# Altium PCB XPIMU_1V1.PCBDOC (part 3 of 3)
Units mil, origin at the board's own origin, x right, y up, seen from the top; angles counter-clockwise.
Board outline 1578.8 x 1145.73 mil, 6 copper layers (Top Layer, Internal Plane 1, Mid-Layer 1, Mid-Layer 2, Mid-Layer 3, Bottom Layer); 139 components, 101 nets, 532 pads, 256 vias.
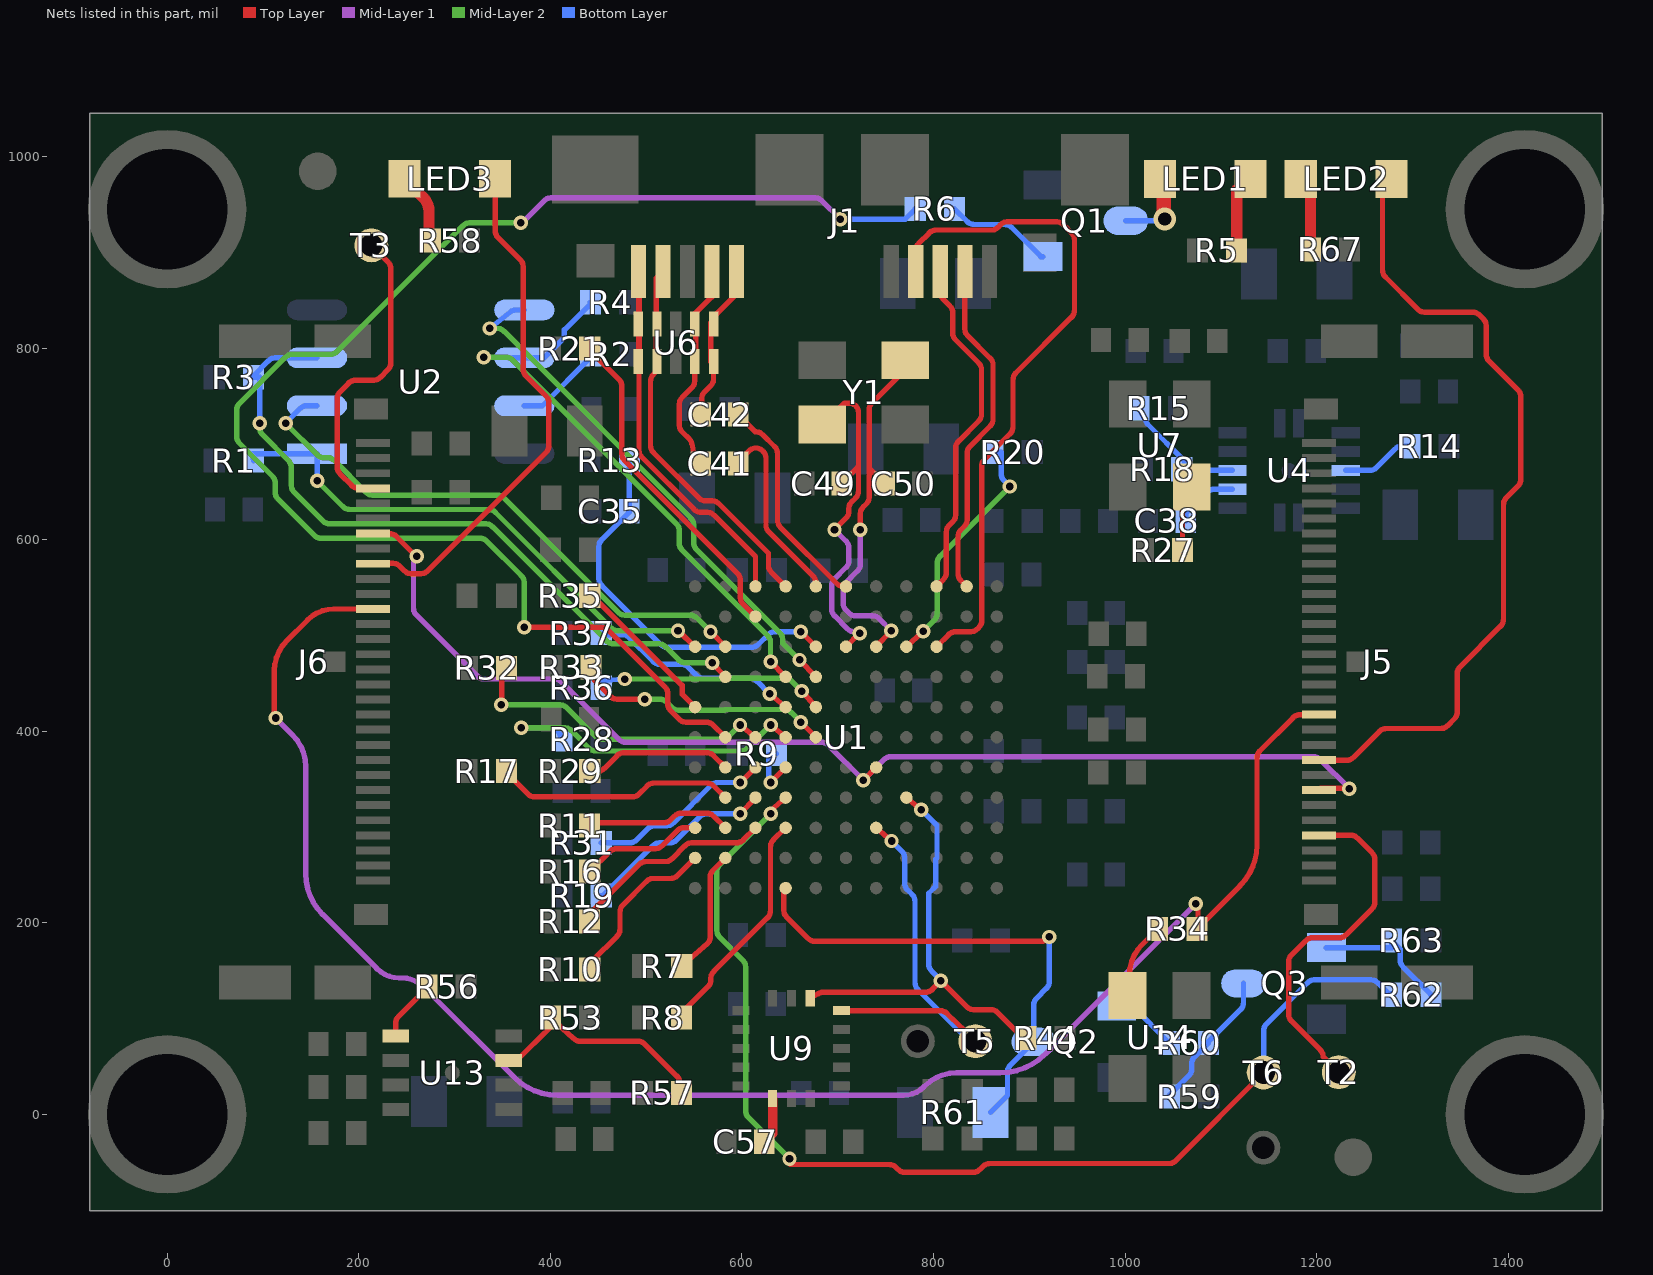
[diagram p7: the nets of this part, all layers, seen from the top]

## Via types
v1: diameter 15, hole 7.87, Top Layer to Bottom Layer, 205 vias
v2: diameter 23.62, hole 13.78, Top Layer to Bottom Layer, 41 vias
v3: diameter 0, hole 0, Top Layer to Bottom Layer, 6 vias
v4: diameter 19, hole 9.84, Top Layer to Bottom Layer, 4 vias

## Nets (pads, with @x,y where several pads share a name; then routed paths per layer and width w, separated by ;. In a path a pad name is that pad's centre, name@x,y a point inside that pad or via, vN(x,y) a via of type N, cw(c..) or ccw(c..) an arc to the next point about the centre after c; other vN are vias at no path point) (continued)
GPIO45: R6.1 U1.F2 | length 1530.9
  Top Layer w5.6: v1(372.66,508.44) 453.42,508.44 cw(c453.42,498.64) 460.35,505.57 519.79,446.13 cw(c512.86,439.2) 522.66,439.2 522.66,428.5 ccw(c532.46,428.5) 525.53,421.57 534.79,412.31 ccw(c541.72,419.24) 541.72,409.44 562.88,409.44 cw(c562.88,399.64) 569.81,406.57 U1.F2@582.68,393.7
  Mid-Layer 1 w5.6: v1(369.21,930.64) 370.54,930.64 393.82,953.92 cw(c400.75,946.99) 400.75,956.79 676.26,956.79 cw(c676.26,946.99) 683.18,953.92 v1(702.66,934.44)
  Mid-Layer 2 w5.6: v1(369.21,930.64) 315.92,930.64 ccw(c315.92,920.84) 308.99,927.77 177.53,796.31 cw(c170.6,803.24) 170.6,793.44 130.72,793.44 ccw(c130.72,783.64) 123.79,790.57 75.53,742.31 ccw(c82.46,735.38) 72.66,735.38 72.66,707.5 ccw(c82.46,707.5) 75.53,700.57 109.97,666.13 cw(c103.04,659.2) 112.84,659.2 112.84,649.32 ccw(c122.64,649.32) 115.71,642.39 153.79,604.31 ccw(c160.72,611.24) 160.72,601.44 326.6,601.44 cw(c326.6,591.64) 333.53,598.57 369.79,562.31 cw(c362.86,555.38) 372.66,555.38 v1(372.66,508.44)
  Bottom Layer w5.6: v1(702.66,934.44) 770.51,934.44 770.51,934.77 R6.1@781.01,945.27
IMU_INT: R44.1 U1.H8 U9.6 | length 476.3
  Top Layer w5.6: U9.6@671.35,121.26 679.7,126.11 cw(c684.62,117.64) 684.62,127.44 791.6,127.44 ccw(c791.6,137.24) 798.53,130.31 v1(807.66,139.44) 834.79,112.31 ccw(c841.72,119.24) 841.72,109.44 859.7,109.44 cw(c859.7,99.64) 866.63,106.57 892.19,81.02 R44.1@896.44,79.71 ; U1.H8@771.65,330.71 v1(787.4,317.89)
  Bottom Layer w5.6: v1(787.4,317.89) 803.66,301.64 803.66,267.82 802.45,266.61 802.45,238.31 795.03,230.89 795.03,156.8 ; v1(807.66,139.44) 807.66,140.12 797.9,149.87 ; 795.03,156.8 ccw(c804.83,156.8) 797.9,149.87 ; 795.03,156.8 ccw(c804.83,156.8) 797.9,149.87
LEDOUT0: J5.9 LED2.1 | length 842.2
  Top Layer w5.6: J5.9@1202.39,370.08 1202.8,369.67 1231.31,369.67 ccw(c1231.31,379.47) 1238.24,372.55 1265.62,399.93 cw(c1272.55,393) 1272.55,402.8 1329.54,402.8 ccw(c1329.54,412.6) 1336.47,405.67 1343.83,413.03 ccw(c1336.91,419.96) 1346.71,419.96 1346.71,460.31 cw(c1356.51,460.31) 1349.58,467.24 1392.08,509.74 ccw(c1385.15,516.67) 1394.95,516.67 1394.95,636.6 cw(c1404.75,636.6) 1397.82,643.53 1410.15,655.86 ccw(c1403.22,662.79) 1413.02,662.79 1413.02,749.29 ccw(c1403.22,749.29) 1410.15,756.22 1379.71,786.66 cw(c1386.64,793.59) 1376.84,793.59 1376.84,823.41 ccw(c1367.04,823.41) 1373.97,830.34 1369.75,834.55 ccw(c1362.82,827.62) 1362.82,837.42 1312.59,837.42 cw(c1312.59,847.22) 1305.66,840.29 1271.53,874.43 cw(c1278.46,881.36) 1268.66,881.36 1268.66,958.41 cw(c1278.46,958.41) 1271.53,965.34 LED2.1@1277.86,976.47
LEDOUT1: J6.9 LED3.1 | length 544.3
  Top Layer w5.6: J6.9@214.93,574.8 215.38,575.25 235.81,575.25 cw(c235.81,565.45) 242.74,572.38 247.76,567.36 ccw(c254.69,574.29) 254.69,564.49 264.98,564.49 ccw(c264.98,574.29) 271.91,567.36 395.56,691.02 ccw(c388.63,697.95) 398.43,697.95 398.44,743 ccw(c388.63,743) 395.56,749.93 374.56,770.94 cw(c381.49,777.87) 371.69,777.87 371.69,885.1 ccw(c361.89,885.1) 368.82,892.03 345.26,915.59 cw(c352.19,922.52) 342.39,922.52 LED3.1@342.39,976.56
MCLK27M: J5.12 J6.12 R34.1 | length 1784.8
  Top Layer w5.6: v1(113.23,413.78) 111.97,413.78 111.97,463.34 cw(c155.67,463.34) 124.77,494.24 146.89,516.36 cw(c173.92,489.34) 173.92,527.56 J6.12@214.93,527.56 ; v1(1073.61,220.03) 1076.04,220.03 1076.04,205.44 R34.1@1074.86,193.72 1120.31,239.17 ccw(c1078.43,281.06) 1137.66,281.06 1137.66,372.38 cw(c1147.46,372.38) 1140.53,379.31 1175.67,414.45 cw(c1182.6,407.52) 1182.6,417.32 J5.12@1202.39,417.32
  Mid-Layer 1 w5.6: v1(113.23,413.78) 130.94,396.07 cw(c97.81,362.95) 144.66,362.95 144.66,251.1 ccw(c204.2,251.1) 162.1,209 218.88,152.22 ccw(c242.5,175.84) 242.5,142.44 244.83,142.44 cw(c244.83,109.04) 268.44,132.66 362.45,38.65 ccw(c407.74,83.94) 407.74,19.89 768.42,19.89 ccw(c768.42,50.52) 790.08,28.86 790.83,29.61 cw(c824.23,-3.79) 824.23,43.44 869.46,43.44 ccw(c869.46,110.24) 916.7,63.01 1072.37,218.68 1072.26,218.68 v1(1073.61,220.03)
NCS: T5.1 U1.J7 U9.5 | length 419.9
  Top Layer w5.6: U9.5@704.02,108.27 806.95,108.27 cw(c806.95,98.47) 813.78,105.49 T5.1@843.66,76.44 ; U1.J7@740.16,299.21 v1(756.22,285.42)
  Bottom Layer w5.6: v1(756.22,285.42) 766.98,274.66 cw(c760.05,267.73) 769.85,267.73 769.85,241.48 ccw(c779.65,241.48) 772.72,234.55 777.79,229.47 cw(c770.86,222.54) 780.66,222.54 780.66,137.5 ccw(c790.46,137.5) 783.53,130.57 834.79,79.31 ccw(c841.72,86.24) 841.72,76.44 T5.1@843.66,76.44
NETC38_2: C38.2 U4.7 | length 66.6
  Bottom Layer w5.6: C38.2@1063.28,619.44 1063.28,627.05 1085.92,649.69 cw(c1092.85,642.76) 1092.85,652.56 U4.7@1112.11,652.56
NETC41_1: C41.1 U1.A5 | length 200.3
  Top Layer w5.5: C41.1@596.35,679.44 596.35,681.41 607.79,692.85 cw(c614.6,686.05) 621.4,692.85 622.29,691.96 cw(c615.49,685.16) 625.11,685.16 625.11,615.12 ccw(c634.74,615.12) 627.93,608.32 674.35,561.9 cw(c667.54,555.09) 677.17,555.09 U1.A5@677.17,551.18
  Top Layer w6: C41.1@594.66,676.43 C41.1@596.35,679.44
NETC42_1: C42.1 U1.A6 | length 230.8
  Top Layer w5.5: C42.1@596.35,730.44 596.35,730.16 614,712.5 614.74,712.5 cw(c614.74,702.87) 621.55,709.68 634.29,696.93 cw(c627.49,690.13) 637.11,690.13 637.11,620.09 ccw(c646.74,620.09) 639.93,613.29 699.22,554 ccw(c706.02,560.81) 706.02,551.18 U1.A6@708.66,551.18
NETC57_2: C57.2 U9.14 | length 48.7
  Top Layer w9.84: C57.2@623.35,-28.56 631.98,-19.93 U9.14@631.98,16.54
NETLED1_1: LED1.1 R5.2 | length 82.4
  Top Layer w12: R5.2@1116.33,901.9 1116.33,965.01 1127.88,976.56 LED1.1@1130.8,976.47
NETLED1_2: LED1.2 Q1.3 | length 85.4
  Top Layer w15: LED1.2@1036.31,976.47 1040.4,973.74 1040.4,943.96 v2(1041.41,934.74)
  Bottom Layer w5.6: Q1.3@1000.81,932.84 1039.51,932.84 v2(1041.41,934.74)
NETLED2_2: LED2.2 R67.2 | length 79.7
  Top Layer w11.81: LED2.2@1183.37,976.47 1193.47,971.35 R67.2@1193.47,902.96
NETLED3_2: LED3.2 R58.2 | length 74.7
  Top Layer w11.81: LED3.2@247.9,976.56 267.31,957.15 cw(c252.7,942.54) 273.37,942.54 273.37,913.39 R58.2@274.67,912.09
NETQ1_1: Q1.1 R6.2 | length 112
  Bottom Layer w5.6: R6.2@821.96,945.27 835.42,931.81 ccw(c842.35,938.74) 842.35,928.94 874.53,928.94 cw(c874.53,919.14) 881.46,926.07 912.09,895.44 Q1.1@914.19,895.44
NETQ2_1: Q2.1 R60.1 | length 70.8
  Bottom Layer w5.6: Q2.1@991.24,113.14 991.76,112.62 1008.07,112.62 R60.1@1046.08,74.61
NETQ3_1: Q3.1 R62.2 R63.2 | length 148.7
  Bottom Layer w5.6: Q3.1@1210.16,174.13 1278.2,174.13 R63.2@1278.2,181.63 1287.15,172.68 1287.15,161.02 ccw(c1296.95,161.02) 1290.02,154.09 R62.2@1319.14,124.97
NETQ3_3: Q3.3 R59.1 R60.2 | length 148.8
  Bottom Layer w5.6: R59.1@1046.42,18.62 1046.42,20.21 1066.73,40.51 ccw(c1059.8,47.44) 1069.6,47.44 1069.6,53.11 cw(c1079.4,53.11) 1072.47,60.04 R60.2@1087.03,74.61 1087.03,75.93 1120.67,109.57 ccw(c1113.74,116.5) 1123.54,116.5 Q3.3@1123.54,136.73
NETR2_1: R2.1 U2.7 | length 94.7
  Bottom Layer w5.6: U2.7@372.93,739.74 391.83,739.74 443.07,790.98 443.07,793.44 R2.1@442.19,793.44
NETR7_1: R7.1 U1.K2 | length 131.9
  Top Layer w5.6: R7.1@537.16,154.86 564.11,178.41 ccw(c557.18,185.34) 566.98,185.34 566.98,247.96 cw(c576.78,247.96) 569.85,254.89 U1.K2@582.68,267.72
NETR8_1: R8.1 U1.J4 | length 241.4
  Top Layer w5.6: R8.1@537.1,101.11 537.13,105.91 564.79,133.57 ccw(c557.86,140.5) 567.66,140.5 567.66,142.12 cw(c577.46,142.12) 570.53,149.05 626.94,205.46 ccw(c620.01,212.39) 629.81,212.39 629.81,279.3 cw(c639.61,279.3) 632.69,286.23 U1.J4@645.67,299.21
NETR10_1: R10.1 U1.K1 | length 175.1
  Top Layer w5.6: R10.1@441.13,151.44 441.13,153.61 cw(c450.93,153.61) 444,160.54 469.91,186.45 ccw(c462.98,193.38) 472.78,193.38 472.78,211.5 cw(c482.58,211.5) 475.65,218.43 500.67,243.45 cw(c507.6,236.52) 507.6,246.32 525.72,246.32 ccw(c525.72,256.12) 532.65,249.19 U1.K1@551.18,267.72
NETR11_1: R11.1 U1.J2 | length 153.6
  Top Layer w5.6: R11.1@441.04,301.58 441.13,304.44 518.6,304.44 ccw(c518.6,314.24) 525.53,307.31 529.79,311.57 cw(c536.72,304.64) 536.72,314.44 563.39,314.44 cw(c563.39,304.64) 570.32,311.57 U1.J2@582.68,299.21
NETR12_1: R12.1 U1.J3 | length 218.9
  Top Layer w5.6: R12.1@441.04,201.4 440.16,200.41 440.16,204.38 cw(c449.96,204.38) 443.03,211.31 492.79,261.07 cw(c499.72,254.14) 499.72,263.94 520.1,263.94 ccw(c520.1,273.74) 527.03,266.81 540.79,280.57 cw(c547.72,273.64) 547.72,283.44 594.34,283.44 ccw(c594.34,293.24) 601.27,286.31 U1.J3@614.17,299.21
NETR14_2: R14.2 U4.3 | length 76.6
  Bottom Layer w5.6: U4.3@1230.22,672.24 1255.4,672.24 ccw(c1255.4,682.04) 1262.33,675.11 1281.79,694.57 cw(c1288.72,687.64) 1288.72,697.44 R14.2@1297.19,697.44
NETR15_2: R15.2 R18.1 U4.8 | length 137.3
  Bottom Layer w5.6: R15.2@1014.65,737.07 1018.19,730.44 1023.13,720.94 R18.1@1062.13,681.93 ; R18.1@1059.13,673.44 1062.86,679.16 1062.86,680.17 1062.13,680.9 R18.1@1062.13,681.93 ; U4.8@1112.11,672.24 1071.82,672.24 R18.1@1062.13,681.93
NETR16_1: R16.1 U1.J1 | length 127.7
  Top Layer w5.6: R16.1@441.13,253.44 462.26,274.57 cw(c469.19,267.64) 469.19,277.44 509.6,277.44 ccw(c509.6,287.24) 516.53,280.31 532.56,296.34 cw(c539.49,289.41) 539.49,299.21 U1.J1@551.18,299.21
NETR17_1: R17.1 U1.H2 | length 251.3
  Top Layer w5.6: R17.1@354.13,358.44 354.13,356.87 376.69,334.31 ccw(c383.62,341.24) 383.62,331.44 485.6,331.44 ccw(c485.6,341.24) 492.53,334.31 501.28,343.06 cw(c508.21,336.13) 508.21,345.93 563.4,345.93 cw(c563.4,336.13) 570.33,343.06 U1.H2@582.68,330.71
NETR19_1: R19.1 U1.H3 | length 202.5
  Top Layer w5.6: v1(598.43,313.91) U1.H3@614.17,330.71
  Bottom Layer w5.6: R19.1@453.13,228.35 455.15,228.35 507.37,280.57 cw(c514.3,273.64) 514.3,283.44 524.6,283.44 ccw(c524.6,293.24) 531.53,286.31 556.26,311.04 cw(c563.19,304.11) 563.19,313.91 v1(598.43,313.91)
NETR20_1: R20.1 U1.C8 | length 259.4
  Top Layer w5.6: U1.C8@771.65,488.19 v1(789.11,504.18)
  Mid-Layer 2 w5.6: v1(789.11,504.18) 800.94,516 ccw(c794.01,522.93) 803.81,522.93 803.81,575.53 cw(c813.61,575.53) 806.68,582.46 v1(879.66,655.44)
  Bottom Layer w5.6: R20.1@862.19,691.44 870.66,691.44 870.66,668.5 ccw(c880.46,668.5) 873.53,661.57 v1(879.66,655.44)
NETR21_1: R21.1 U1.B3 | length 349.7
  Top Layer w5.6: R21.1@441.13,799.44 441.13,797.87 471.79,767.21 cw(c464.86,760.28) 474.66,760.28 474.66,689.5 ccw(c484.46,689.5) 477.53,682.57 595.54,564.56 cw(c588.61,557.63) 598.41,557.63 598.41,539.5 ccw(c608.21,539.5) 601.28,532.58 U1.B3@614.17,519.69
NETR27_2: R27.2 U7.3 | length 70.7
  Top Layer w5.6: R27.2@1059.95,589.04 1059.95,647.45 U7.3@1069.56,655.08
NETR28_1: R28.1 U1.F4 | length 349.5
  Top Layer w5.6: v1(629.92,406.48) U1.F4@645.67,393.7
  Mid-Layer 2 w5.6: v1(369.66,403.44) 415.16,403.44 cw(c415.16,393.64) 422.09,400.57 440.45,382.21 ccw(c447.38,389.13) 447.38,379.33 598.72,379.33 ccw(c598.72,389.13) 605.65,382.21 v1(629.92,406.48)
  Bottom Layer w5.6: v1(369.66,403.44) 400.66,403.44 cw(c400.66,393.64) 409.71,397.41 R28.1@412.19,391.44
NETR29_1: R29.1 U1.G2 | length 154.7
  Top Layer w5.6: R29.1@441.13,358.44 449.6,358.44 ccw(c449.6,368.24) 456.53,361.31 470.04,374.82 cw(c476.97,367.89) 476.97,377.69 563.14,377.69 cw(c563.14,367.89) 570.07,374.82 U1.G2@582.68,362.2
NETR31_1: R31.1 U1.G3 | length 192
  Top Layer w5.6: v1(598.43,346.46) U1.G3@614.17,362.2
  Bottom Layer w5.6: R31.1@453.13,283.46 482.98,283.46 ccw(c482.98,293.26) 489.91,286.33 502.15,298.57 cw(c509.08,291.64) 509.08,301.44 521.6,301.44 ccw(c521.6,311.24) 528.53,304.31 567.81,343.59 cw(c574.74,336.66) 574.74,346.46 v1(598.43,346.46)
NETR32_1: R32.1 U1.F3 | length 331.9
  Top Layer w5.6: v1(348.66,427.44) 349.14,427.92 349.14,463.44 R32.1@354.35,466.18 ; v1(598.06,406.48) U1.F3@614.17,393.7
  Mid-Layer 2 w5.6: v1(348.66,427.44) 410.15,427.44 cw(c410.15,417.64) 417.08,424.57 447.28,394.37 ccw(c454.21,401.3) 454.21,391.5 579.03,391.5 ccw(c579.03,401.3) 585.96,394.37 v1(598.06,406.48)
NETR33_1: R33.1 U1.F5 | length 269
  Top Layer w5.6: R33.1@442.49,466.84 444.66,461.72 444.66,458.5 ccw(c454.46,458.5) 447.53,451.57 462.79,436.31 ccw(c469.72,443.24) 469.72,433.44 v1(498.66,433.44) ; v1(661.42,409.45) U1.F5@677.17,393.7
  Mid-Layer 2 w5.6: v1(498.66,433.44) 514.18,433.44 cw(c514.18,423.64) 521.11,430.57 526.85,424.84 ccw(c533.77,431.77) 533.77,421.97 581.81,421.97 582.56,422.71 644.09,422.71 cw(c644.09,412.91) 651.02,419.84 v1(661.42,409.45)
NETR34_2: R34.2 U14.3 | length 80.1
  Top Layer w5.6: U14.3@1002.47,124.02 1004.44,145.31 cw(c1049.4,145.31) 1017.61,177.11 1033.91,193.42 R34.2@1033.91,193.72
NETR35_1: R35.1 U1.E1 | length 163.1
  Top Layer w5.6: R35.1@441.13,541.44 446.32,539.21 537.66,447.87 537.66,438.72 U1.E1@551.18,425.2
NETR36_1: R36.1 U1.E5 | length 247.1
  Top Layer w5.6: v1(662.4,441.92) U1.E5@677.17,425.2
  Mid-Layer 2 w5.6: v1@478.37,455.15 478.89,455.96 v1(477.66,454.44) 582.35,454.44 583.1,455.19 645.07,455.19 cw(c645.07,445.39) 652,452.32 v1(662.4,441.92)
  Bottom Layer w5.6: R36.1@453.13,445.44 453.13,452.65 v1(477.66,454.44)
NETR37_1: R37.1 U1.E4 | length 222.6
  Top Layer w5.6: v1(628.94,438.95) U1.E4@645.67,425.2
  Bottom Layer w5.6: R37.1@453.13,502.44 453.13,500.87 475.18,500.87 cw(c475.18,491.07) 482.11,498 507.44,472.67 ccw(c514.37,479.6) 514.37,469.8 536.96,469.8 cw(c536.96,460) 543.89,466.93 552.79,458.02 ccw(c559.72,464.95) 559.72,455.15 583.62,455.15 583.66,455.19 608.64,455.19 cw(c608.64,445.39) 615.57,452.32 v1(628.94,438.95)
NETR53_1: R53.1 R57.2 U13.7 | length 243
  Top Layer w5.6: U13.7@356.72,56.24 364.98,56.24 400.19,91.44 R53.1@400.16,101.11 424.32,79.31 ccw(c431.25,86.24) 431.25,76.44 491.6,76.44 cw(c491.6,66.64) 498.53,73.57 532.38,39.72 cw(c525.45,32.79) 535.25,32.79 535.25,23.5 R57.2@537.13,22.44
NETR56_2: R56.2 U13.1 | length 64.7
  Top Layer w5.6: U13.1@238.61,81.83 238.61,95.22 cw(c248.41,95.22) 241.48,102.15 271.19,131.87 R56.2@271.19,133.44
OTG_ID: J1.4 U1.C9 | length 705.6
  Top Layer w5.6: J1.4@781.5,879.92 781.5,902.07 cw(c791.3,902.07) 784.37,909 795.62,920.26 cw(c802.55,913.33) 802.55,923.13 860.37,923.13 ccw(c860.37,932.93) 867.3,926 870.06,928.76 cw(c876.99,921.83) 876.99,931.63 928.56,931.63 cw(c928.56,921.83) 935.49,928.76 944.26,919.99 cw(c937.33,913.06) 947.13,913.06 947.13,839.22 cw(c937.33,839.22) 944.26,832.29 885.84,773.87 ccw(c892.77,766.94) 882.97,766.94 882.97,717.53 cw(c873.17,717.53) 880.1,710.6 853.17,683.67 ccw(c860.1,676.74) 850.3,676.74 850.3,515.3 cw(c840.5,515.3) 847.43,508.37 845.86,506.81 cw(c838.94,513.74) 838.94,503.94 822.96,503.94 ccw(c822.96,494.14) 816.03,501.07 U1.C9@803.15,488.19
PMODE0: R9.2 U1.G4 | length 61.5
  Top Layer w5.6: v1(629.92,346.46) U1.G4@645.67,362.2
  Bottom Layer w5.6: v1(629.92,346.46) 627.94,346.46 627.94,375.43 R9.2@636.13,376.44
PMODE1: R62.1 T6.1 U1.H4 | length 1188.8
  Top Layer w5.6: v1(630.02,313.74) 630.02,317.2 U1.H4@645.67,330.71 ; v1(649.67,-46.14) 650.43,-46.9 650.43,-52.26 753.74,-52.26 cw(c753.74,-62.06) 760.67,-55.13 762.97,-57.44 ccw(c769.9,-50.51) 769.9,-60.31 841.58,-60.31 ccw(c841.58,-50.51) 848.51,-57.44 851.78,-54.17 cw(c858.71,-61.1) 858.71,-51.3 1045.79,-51.3 ccw(c1045.79,-41.5) 1052.72,-48.43 1144.65,43.5 T6.1@1144.65,43.75
  Mid-Layer 2 w5.6: v1(630.02,313.74) 576.74,260.46 ccw(c583.67,253.53) 573.87,253.53 573.87,192.05 ccw(c583.67,192.05) 576.74,185.12 601.02,160.84 cw(c594.09,153.91) 603.89,153.91 603.89,3.7 ccw(c613.69,3.7) 606.76,-3.23 v1(649.67,-46.14)
  Bottom Layer w5.6: T6.1@1144.65,43.75 1144.65,87.47 cw(c1154.45,87.47) 1147.52,94.4 1190.68,137.57 cw(c1197.61,130.64) 1197.61,140.44 1256.57,140.44 cw(c1256.57,130.64) 1263.5,137.57 1274.9,126.17 1277,126.17 R62.1@1278.2,124.97
PMODE2: Q2.3 R61.2 U1.L4 | length 526
  Top Layer w5.6: U1.L4@645.67,236.22 643.79,236.22 643.79,213.02 ccw(c653.59,213.02) 646.66,206.09 669.16,183.6 ccw(c676.09,190.53) 676.09,180.73 912.44,180.73 ccw(c912.44,190.53) 919.37,183.6 v1(921.01,185.24)
  Bottom Layer w5.6: R61.2@859.54,2.13 877.17,19.77 877.17,44.22 cw(c886.97,44.22) 880.04,51.15 Q2.3@904.63,75.74 904.63,114.28 cw(c914.43,114.28) 907.5,121.21 918.14,131.85 ccw(c911.21,138.78) 921.01,138.78 v1(921.01,185.24)
ROM_WPN: R3.2 U1.D2 U2.3 | length 743.4
  Top Layer w5.6: v1(568.96,471.39) U1.D2@582.68,456.69
  Mid-Layer 2 w5.6: v1(96.66,721.44) 96.66,716.5 ccw(c106.46,716.5) 99.53,709.57 126.79,682.31 cw(c119.86,675.38) 129.66,675.38 129.66,656.5 ccw(c139.46,656.5) 132.53,649.57 162.79,619.31 ccw(c169.72,626.24) 169.72,616.44 332.6,616.44 cw(c332.6,606.64) 339.53,613.57 459.07,494.03 ccw(c466,500.96) 466,491.16 513.18,491.16 cw(c513.18,481.36) 520.11,488.29 534.15,474.26 ccw(c541.07,481.19) 541.07,471.39 v1(568.96,471.39)
  Bottom Layer w5.6: v1(96.66,721.44) 96.66,769.44 R3.2@90.13,769.44 90.13,771.02 105.99,786.87 cw(c112.92,779.94) 112.92,789.74 U2.3@156.39,789.74
RSTN: C35.2 R13.2 U1.C5 | length 406.6
  Top Layer w5.6: v1(661.42,503.94) U1.C5@677.17,488.19
  Bottom Layer w5.6: R13.2@482.51,683.05 482.35,681.65 C35.2@482.25,629.56 482.25,628.32 453.53,599.6 ccw(c460.46,592.67) 450.66,592.67 450.66,559.19 ccw(c460.46,559.19) 453.53,552.26 515.26,490.53 ccw(c522.18,497.46) 522.18,487.66 610.12,487.66 ccw(c610.12,497.46) 617.05,490.53 627.58,501.07 cw(c634.51,494.14) 634.51,503.94 v1(661.42,503.94)
SPI_MISO: U1.C2 U2.2 | length 593.2
  Top Layer w5.6: v1(567.27,503.94) U1.C2@582.68,488.19
  Mid-Layer 2 w5.6: v1(123.66,721.44) 156.79,688.31 ccw(c163.72,695.24) 163.72,685.44 167.6,685.44 cw(c167.6,675.64) 174.53,682.57 207.79,649.31 ccw(c214.72,656.24) 214.72,646.44 344.6,646.44 cw(c344.6,636.64) 351.53,643.57 471.08,524.02 ccw(c478.01,530.95) 478.01,521.15 546,521.15 cw(c546,511.35) 552.93,518.28 v1(567.27,503.94)
  Bottom Layer w5.6: v1(123.66,721.44) 138.78,736.81 cw(c145.77,729.94) 145.77,739.74 U2.2@156.39,739.74
SPI_MOSI: U1.D5 U2.5 | length 552.7
  Top Layer w5.6: v1(660.18,474.4) U1.D5@677.17,456.69
  Mid-Layer 2 w5.6: v1(336.66,820.44) 344.6,820.44 cw(c344.6,810.64) 351.53,817.57 546.79,622.31 cw(c539.86,615.38) 549.66,615.38 549.66,596.74 ccw(c559.46,596.74) 552.53,589.81 639.68,502.66 cw(c632.75,495.73) 642.55,495.73 642.55,492.02 v1(660.18,474.4)
  Bottom Layer w5.6: v1(336.66,820.44) 357.97,837.58 cw(c364.11,829.94) 364.11,839.74 U2.5@372.93,839.74
SPI_SCK: R4.2 U1.D4 U2.6 | length 619.2
  Top Layer w5.6: v1(629.92,472.7) U1.D4@645.67,456.69
  Mid-Layer 2 w5.6: v1(330.66,790.44) 353.6,790.44 cw(c353.6,780.64) 360.53,787.57 531.79,616.31 cw(c524.86,609.38) 534.66,609.38 534.66,596.04 ccw(c544.46,596.04) 537.53,589.11 627.05,499.6 cw(c620.12,492.67) 629.92,492.67 v1(629.92,472.7)
  Bottom Layer w5.6: v1(330.66,790.44) 363.56,789.74 ccw(c363.77,799.54) 363.77,789.74 U2.6@372.93,789.74 393.6,789.74 414.66,810.8 414.66,818.93 441.89,846.15 R4.2@441.89,847.73
SPI_SSN: R1.2 U1.C1 U2.1 | length 568
  Top Layer w5.6: v1(533.28,504.92) U1.C1@551.18,488.19
  Mid-Layer 2 w5.6: v1(156.66,661.44) 183.79,634.31 ccw(c190.72,641.24) 190.72,631.44 335.6,631.44 cw(c335.6,621.64) 342.53,628.57 463.32,507.79 ccw(c470.25,514.72) 470.25,504.92 v1(533.28,504.92)
  Bottom Layer w5.6: R1.2@90.13,682.44 89.03,689.74 U2.1@156.39,689.74 156.66,689.74 v1(156.66,661.44)
SS_DM: J1.2 U1.A10 | length 356.9
  Top Layer w5.5: J1.2@832.68,879.92 832.68,819.83 ccw(c842.3,819.83) 835.5,813.03 859.29,789.23 cw(c852.49,782.42) 862.11,782.42 862.11,725.43 cw(c852.49,725.43) 859.29,718.62 837.93,697.26 ccw(c844.74,690.45) 835.11,690.45 835.11,620.76 cw(c825.49,620.76) 832.29,613.95 828.48,610.14 ccw(c835.29,603.33) 825.66,603.33 825.66,564.15 ccw(c835.29,564.15) 828.48,557.35 U1.A10@834.65,551.18
SS_DP: J1.3 U1.A9 | length 362.3
  Top Layer w5.5: U1.A9@803.15,551.18 810.53,558.56 ccw(c803.72,565.37) 813.35,565.37 813.35,607.99 cw(c822.97,607.99) 816.17,614.8 820.29,618.92 ccw(c813.49,625.73) 823.11,625.73 823.11,695.75 cw(c832.74,695.75) 825.93,702.56 847.29,723.92 ccw(c840.49,730.73) 850.11,730.73 850.11,777.45 ccw(c840.49,777.45) 847.29,784.26 822.93,808.62 cw(c829.74,815.43) 820.11,815.43 820.11,837 ccw(c810.49,837) 817.29,843.81 809.91,851.2 cw(c816.71,858) 807.09,858 J1.3@807.09,868.44
  Top Layer w5.6: J1.3@807.09,868.44 J1.3@807.09,879.92
SS_RX_M: J1.9 U1.A4 U6.4 U6.7 | length 405.2
  Top Layer w5.5: U6.7@511.38,785.76 511.07,785.45 511.07,775.85 507.48,772.26 ccw(c514.29,765.45) 504.66,765.45 504.66,697.91 ccw(c514.29,697.91) 507.48,691.11 555.33,643.26 ccw(c562.13,650.07) 562.13,640.44 568.97,640.44 cw(c568.97,630.82) 575.78,637.62 627.66,585.74 627.66,573.18 ccw(c637.29,573.18) 630.48,566.37 U1.A4@645.67,551.18
  Top Layer w5.6: U6.7@511.38,785.76 510.66,785.76 U6.4@510.66,823.44 ; U6.4@511.38,825.13 U6.4@510.66,825.84 ; J1.9@517.72,879.92 510.66,872.87 U6.4@510.66,825.84 ; U6.4@510.66,823.44 511.38,825.73 510.66,826.44 U6.4@510.66,825.84 ; U6.4@510.66,823.44 U6.4@510.66,825.84
SS_RX_P: J1.10 U1.A3 U6.5 U6.6 | length 393.6
  Top Layer w5.5: U6.6@491.69,783.08 U6.6@491.69,785.76 492.66,785.76 492.66,692.94 ccw(c502.29,692.94) 495.48,686.14 550.36,631.26 ccw(c557.16,638.07) 557.16,628.44 564,628.44 cw(c564,618.82) 570.8,625.62 614.17,582.25 U1.A3@614.17,551.18
  Top Layer w6: U6.6@491.69,785.76 492.68,785.76 U6.5@492.68,825.13 ; J1.10@492.13,879.92 492.66,879.92 U6.5@492.66,825.13 ; U6.5@492.68,825.13 U6.5@491.69,825.13 U6.5@492.66,825.13
SS_TX_M: C42.2 J1.6 U6.1 U6.10 | length 171.4
  Top Layer w5.5: C42.2@556.98,730.44 558.21,730.44 558.21,747.45 cw(c567.83,747.45) 561.03,754.26 567.61,760.85 ccw(c560.81,767.65) 570.43,767.65 U6.10@570.43,785.76
  Top Layer w5.6: U6.10@570.43,785.76 567.66,785.76 U6.1@567.66,826.44 ; U6.1@570.43,825.13 U6.1@567.66,826.44 ; J1.6@594.49,871.44 594.49,856.5 570.43,832.44 U6.1@567.66,826.44
  Top Layer w6: J1.6@594.49,871.44 J1.6@594.49,879.92
SS_TX_P: C41.2 J1.7 U6.2 U6.9 | length 227.4
  Top Layer w5.5: U6.9@550.75,785.76 550.75,765.51 cw(c541.12,765.51) 547.93,758.71 537.48,748.26 ccw(c544.29,741.45) 534.66,741.45 534.66,719.43 ccw(c544.29,719.43) 537.48,712.62 545.15,704.96 cw(c538.34,698.15) 547.76,700.13 550.08,689.08 cw(c540.66,687.1) 550.28,687.1 550.28,679.44 C41.2@556.98,679.44
  Top Layer w5.6: U6.2@550.75,825.13 550.75,835.44 568.9,853.59 J1.7@568.9,865.44
  Top Layer w6: U6.9@550.75,785.76 551.73,785.76 551.73,825.13 U6.2@550.75,825.13 ; J1.7@568.9,865.44 J1.7@568.9,879.92
STANDBY: J5.7 J6.7 U1.G7 | length 1285.4
  Top Layer w5.6: J6.7@214.93,606.3 J6.7@232.24,606.3 ; v1(260.71,582.51) 260.1,582.51 239.17,603.43 ; v1(726.78,348.83) U1.G7@740.16,362.2 ; J5.7@1202.39,338.58 1204.25,340.44 1234.04,340.44 v1(1234.04,340.07) ; J6.7@232.24,606.3 cw(c232.24,596.5) 239.17,603.43 ; J6.7@232.24,606.3 cw(c232.24,596.5) 239.17,603.43
  Mid-Layer 1 w5.6: v1(260.71,582.51) 257.16,582.51 257.16,528.55 ; v1(1234.04,340.07) 1203.54,370.57 ccw(c1196.61,363.64) 1196.61,373.44 755.45,373.44 ccw(c755.45,363.64) 748.52,370.57 v1(726.78,348.83) 690.04,385.57 ; 257.16,528.55 ccw(c266.96,528.55) 260.03,521.63 ; 257.16,528.55 ccw(c266.96,528.55) 260.03,521.63 ; 260.03,521.63 324.34,457.31 ; 324.34,457.31 ccw(c331.27,464.24) 331.27,454.44 ; 324.34,457.31 ccw(c331.27,464.24) 331.27,454.44 ; 331.27,454.44 404.6,454.44 ; 404.6,454.44 cw(c404.6,444.64) 411.53,451.57 ; 404.6,454.44 cw(c404.6,444.64) 411.53,451.57 ; 411.53,451.57 471.79,391.31 ; 471.79,391.31 ccw(c478.72,398.24) 478.72,388.44 ; 471.79,391.31 ccw(c478.72,398.24) 478.72,388.44 ; 478.72,388.44 683.11,388.44 ; 683.11,388.44 cw(c683.11,378.64) 690.04,385.57 ; 683.11,388.44 cw(c683.11,378.64) 690.04,385.57
TEST1: J5.4 T2.1 | length 369.9
  Top Layer w5.6: J5.4@1202.39,291.34 1235.6,291.34 cw(c1235.6,281.54) 1242.53,288.47 1257.79,273.21 cw(c1250.86,266.28) 1260.66,266.28 1260.66,221.5 cw(c1250.86,221.5) 1257.79,214.57 1230.53,187.31 cw(c1223.6,194.24) 1223.6,184.44 1195.72,184.44 ccw(c1195.72,174.64) 1188.79,181.57 1173.53,166.31 ccw(c1180.46,159.38) 1170.66,159.38 1170.66,104.5 ccw(c1180.46,104.5) 1173.53,97.57 1203.79,67.31 cw(c1196.86,60.38) 1206.66,60.38 T2.1@1223.05,44.09
TEST2: J6.4 T3.1 | length 324.6
  Top Layer w5.6: T3.1@213.23,907.1 230.59,889.74 cw(c223.66,882.81) 233.46,882.81 233.46,784.3 cw(c223.66,784.3) 230.59,777.37 222.53,769.31 cw(c215.6,776.24) 215.6,766.44 196.72,766.44 ccw(c196.72,756.64) 189.79,763.57 180.53,754.31 ccw(c187.46,747.38) 177.66,747.38 177.66,675.6 ccw(c187.46,675.6) 180.53,668.67 192.79,656.41 ccw(c199.72,663.34) 199.72,653.54 J6.4@214.93,653.54
XTI: C49.2 U1.C6 Y1.1 | length 367.1
  Top Layer w5.5: Y1.1@683.85,720.18 686.81,722.14 707.1,742.44 711.99,742.44 cw(c711.99,732.82) 721.61,732.82 721.61,676.44 721.61,650.43 cw(c711.99,650.43) 718.79,643.62 714.48,639.31 ccw(c721.29,632.5) 711.66,632.5 711.66,629.43 cw(c702.04,629.43) 708.84,622.62 v1(696.66,610.44)
  Top Layer w5.6: C49.2@704.35,658.44 704.35,659.18 721.61,676.44 ; U1.C6@708.66,488.19 722.96,502.49 v1(723.14,502.31)
  Mid-Layer 1 w5.5: v1(696.66,610.44) 708.84,598.26 cw(c702.04,591.45) 711.66,591.45 711.66,577.98 cw(c702.04,577.98) 708.84,571.17 696.48,558.81 ccw(c703.29,552) 693.66,552 693.66,527.43 ccw(c703.29,527.43) 696.48,520.62 710.35,506.76 ccw(c717.15,513.56) 717.15,503.94 723.14,503.94 v1(723.14,502.31)
XTO: C50.1 U1.C7 Y1.3 | length 387.9
  Top Layer w5.5: v1(723.66,610.44) 723.66,627.17 cw(c733.29,627.17) 726.48,633.98 730.01,637.51 ccw(c723.2,644.31) 732.83,644.31 732.83,674.76 732.83,735.62 cw(c742.45,735.62) 735.65,742.43 767.52,774.3 767.52,785.14 Y1.3@770.47,787.11
  Top Layer w5.6: 732.83,674.76 748.98,658.61 C50.1@748.98,658.44 ; U1.C7@740.16,488.19 v1(755.91,504.92)
  Mid-Layer 1 w5.5: v1(723.66,610.44) 723.66,574.28 cw(c714.04,574.28) 720.84,567.47 708.48,555.11 ccw(c715.29,548.31) 705.66,548.31 705.66,533.43 ccw(c715.29,533.43) 708.48,526.62 711.84,523.26 ccw(c718.65,530.07) 718.65,520.44 736.39,520.44 cw(c736.39,510.82) 743.2,517.62 v1(755.91,504.92)
pads on no net: J5.6 J5.16 J5.17 J5.21 J5.22 J5.31 J5.32 J6.6 J6.16 J6.17 J6.18 J6.19 J6.20 J6.21 J6.22 J6.31 J6.32 M1.1 M2.1 U1.A11 U1.B11 U1.C4 U1.C10 U1.D11 U1.E7 U1.E8 U1.F6 U1.FID1 U1.FID2 U1.G6 U1.H6 U1.K5 U1.L8 U9.7

## Polygon pours and split planes (outlines as drawn)
GND on Top Layer "Top Layer-GND" (solid, remove dead copper, pour order 1002): -54.3,1024.44 -54.3,-77.03 1471.57,-77.03 1471.57,1024.44
3V3 on Top Layer "Top Layer-3V3 1" (solid, remove dead copper, pour order 1007): 671.74,40.82 671.74,-47.55 850.84,-47.55 850.84,40.82
1V2_U3RX on Top Layer "Top Layer-1V2_U3RX" (solid, remove dead copper, pour order 1011): 405.66,734.94 405.66,577.44 492.66,577.44 509.16,560.94 576.66,560.94 576.66,625.44 467.16,734.94
3V3 on Mid-Layer 3 "Mid-Layer 3-3V3" (solid, remove dead copper, pour order 1012): -12.83,691.94 309.83,691.94 309.83,849.92 752.98,849.92 752.98,780.3 961.84,780.3 961.84,895.44 1129.19,895.44 1129.19,699.97 917.66,488.44 861.43,488.44 861.43,556.72 759.67,556.72 759.67,524.59 708.8,524.59 708.8,591.53 577.59,591.53 577.59,465.68 623.11,465.68 623.11,402.75 437.02,402.75 437.02,500.49 491.24,554.71 491.24,608.93 340.62,608.93 340.62,27.88 532.07,27.88 532.07,161.76 793.15,161.76 793.15,243.43 931.04,243.43 931.04,402.75 1089.03,402.75 1089.03,184.52 1340.72,184.52 1340.72,835.19 1471.93,835.19 1471.93,66.71 1303.24,66.71 1303.24,-61.82 -12.83,-61.82
1V2 on Mid-Layer 3 "Mid-Layer 3-1V2" (solid, remove dead copper, pour order 1013): 345.66,34.44 345.66,604.44 483.66,604.44 483.66,550.44 426.66,493.44 426.66,436.81 426.76,434.06 427.04,431.33 427.52,428.63 428.19,425.96 429.04,423.35 430.07,420.8 431.27,418.33 432.64,415.95 434.18,413.67 435.87,411.5 437.71,409.46 439.69,407.55 441.79,405.79 444.02,404.17 446.35,402.72 448.77,401.43 451.28,400.31 453.87,399.37 456.51,398.61 459.19,398.04 461.92,397.66 464.66,397.47 466.03,397.44 630.66,397.44 630.66,469.44 579.66,469.44 579.66,586.44 705.66,586.44 705.66,517.44 765.66,517.44 765.66,553.44 855.66,553.44 855.66,424.44 927.66,424.44 927.66,250.44 789.66,250.44 789.66,169.44 528.66,169.44 528.66,34.44
5V0 on Mid-Layer 3 "Mid-Layer 3-5V0" (solid, remove dead copper, pour order 1014): 846.66,484.44 924.66,484.44 1113.73,673.51 1143.66,673.45 1143.66,907.44 948.66,907.44 948.66,799.44 774.66,799.44 774.66,862.44 291.66,862.44 291.66,706.44 60.66,706.44 60.66,1018.44 1335.66,1018.44 1335.66,193.44 1098.66,193.44 1098.66,412.44 846.66,412.44
3V3 on Bottom Layer "Bottom Layer-3V3" (solid, remove dead copper, pour order 1015): 627.66,820.44 339.66,820.44 339.66,664.44 486.66,664.44 486.66,766.44 627.66,766.44
3V3 on Bottom Layer "Bottom Layer-3V3 1" (solid, remove dead copper, pour order 1019): 606.66,451.44 462.66,451.44 462.66,361.44 606.66,361.44
5V0 on Bottom Layer "Bottom Layer-5V0" (solid, remove dead copper, pour order 1020): 1338.66,832.44 1254.66,832.44 1254.66,778.44 1208.16,731.94 1208.16,565.44 1338.66,565.44
1V2_AVDD on Bottom Layer "Bottom Layer-1V2_AVDD" (solid, remove dead copper, pour order 1021): 741.66,730.44 741.66,550.44 786.66,550.44 855.66,619.44 855.66,730.44
5V0 on Bottom Layer "Bottom Layer-5V0 2" (solid, remove dead copper, pour order 1024): 1291.84,307.44 1158.66,307.44 1158.66,214.44 1291.84,214.44
1V2 on Bottom Layer "Bottom Layer-1V2 3" (solid, remove dead copper, pour order 1025): 327.66,140.94 327.66,-22.56 429.66,-22.56 429.66,22.44 510.66,22.44 510.66,82.44 462.66,82.44 404.16,140.94
GND on Bottom Layer "Bottom Layer-GND" (solid, remove dead copper, pour order 1026): -62.34,1018.44 -62.34,-76.56 1479.66,-76.56 1479.66,1018.44
3V3 on Bottom Layer "Bottom Layer-3V3 3" (solid, remove dead copper, pour order 1030): 1017.66,903.48 1017.66,690.07 1151.52,690.07 1151.52,903.48
no net on Internal Plane 1 (split plane): 1498.06,-100.43 -80.74,-100.43 -80.74,1045.31 1498.06,1045.31
GND on Internal Plane 1 (split plane): 1477.65,-71.54 -54.32,-71.54 -54.32,1025.42 1477.65,1025.42

## Keep-outs
Keep-Out Layer:
  lines w4: -78.74,-59.06 ccw(c-39.37,-59.06) -39.37,-98.43 1456.69,-98.43 ccw(c1456.69,-59.06) 1496.06,-59.06 1496.06,1003.94 ccw(c1456.69,1003.94) 1456.69,1043.31 -39.37,1043.31 ccw(c-39.37,1003.94) -78.74,1003.94 -78.74,-59.06

## Other copper
Top Layer:
  region net GND: 966.26,977.75 377.64,977.75 377.64,1004.36 966.26,1004.36 966.26,977.75
  region net 5V0: 268.48,702.25 232.39,702.25 232.39,668.86 268.48,668.86 268.48,702.25
  region net GND: 266.94,95.27 266.94,-22.79 329,-22.79 329,95.27 266.94,95.27
  region net GND: -50.13,931.07 -50.13,29.13 -12.28,29.13 -12.28,931.07 -50.13,931.07
  region net GND: 1228.71,758.07 1228.71,807.2 1351.04,807.2 1351.04,752.78 1328.27,752.78 1328.27,788.79 1244.6,788.79 1244.6,758.07 1228.71,758.07
  region net GND: 1432.66,894.52 1432.66,51.31 1469.21,51.31 1469.21,894.52 1432.66,894.52
  region net GND: 62.5,752 62.5,814.04 162.26,814.04 162.26,759.61 132.6,759.61 132.6,795.62 87.44,795.62 87.44,752 62.5,752
  region net GND: 1228.1,86.89 1228.1,148.93 1327.87,148.93 1327.87,94.5 1298.2,94.5 1298.2,130.51 1253.04,130.51 1253.04,86.89 1228.1,86.89
  region net GND: 171.05,186.18 171.05,124.14 71.29,124.14 71.29,178.57 100.95,178.57 100.95,142.56 146.11,142.56 146.11,186.18 171.05,186.18
Internal Plane 1 (plane layer: these items are gaps in the copper):
  lines w9.84: -59.34,-76.56 -59.34,1030.44 1482.66,1030.44 1482.66,-76.56 -59.34,-76.56

## Silkscreen, mask and mechanical layers (free items; w line width, h text height)
Top Overlay:
  text "XPerception" at -64.71,668.33 h78.74 r270
  text "1V1" at 1478.04,554.72 h78.74 r90
  text "XPIMU" at 1480.59,270.89 h78.74 r90
Drill Drawing:
  lines w1: -78.74,1003.94 -78.71,1003.94 ; 1456.69,-98.43 1456.72,-98.43 ; 1456.69,1043.31 1456.72,1043.31 ; 1496.06,1003.94 1496.09,1003.94
  lines w10: -78.74,1053.94 -78.74,1233.44 ; 521.84,1183.44 -78.74,1183.44 ; 895.48,1183.44 1496.06,1183.44 ; 1496.06,1053.94 1496.06,1233.44 ; 1506.69,-98.43 1730.66,-98.43 ; 1506.69,1043.31 1730.66,1043.31 ; 1680.66,404.94 1680.66,-98.43 ; 1680.66,539.94 1680.66,1043.31 ; -78.74,1183.44 21.26,1208.44 21.26,1158.44 -78.74,1183.44 ; 1496.06,1183.44 1396.06,1158.44 1396.06,1208.44 1496.06,1183.44 ; 1680.66,-98.43 1655.66,1.57 1705.66,1.57 1680.66,-98.43 ; 1680.66,1043.31 1705.66,943.31 1655.66,943.31 1680.66,1043.31
  text "40.0mm" at 551.84,1145.94 h50
  text "29.0mm" at 1526.12,434.94 h50